# EAGLE board MAG3110_Breakout-Panel-v12 (EAGLE 6.5.0), part 1 of 3
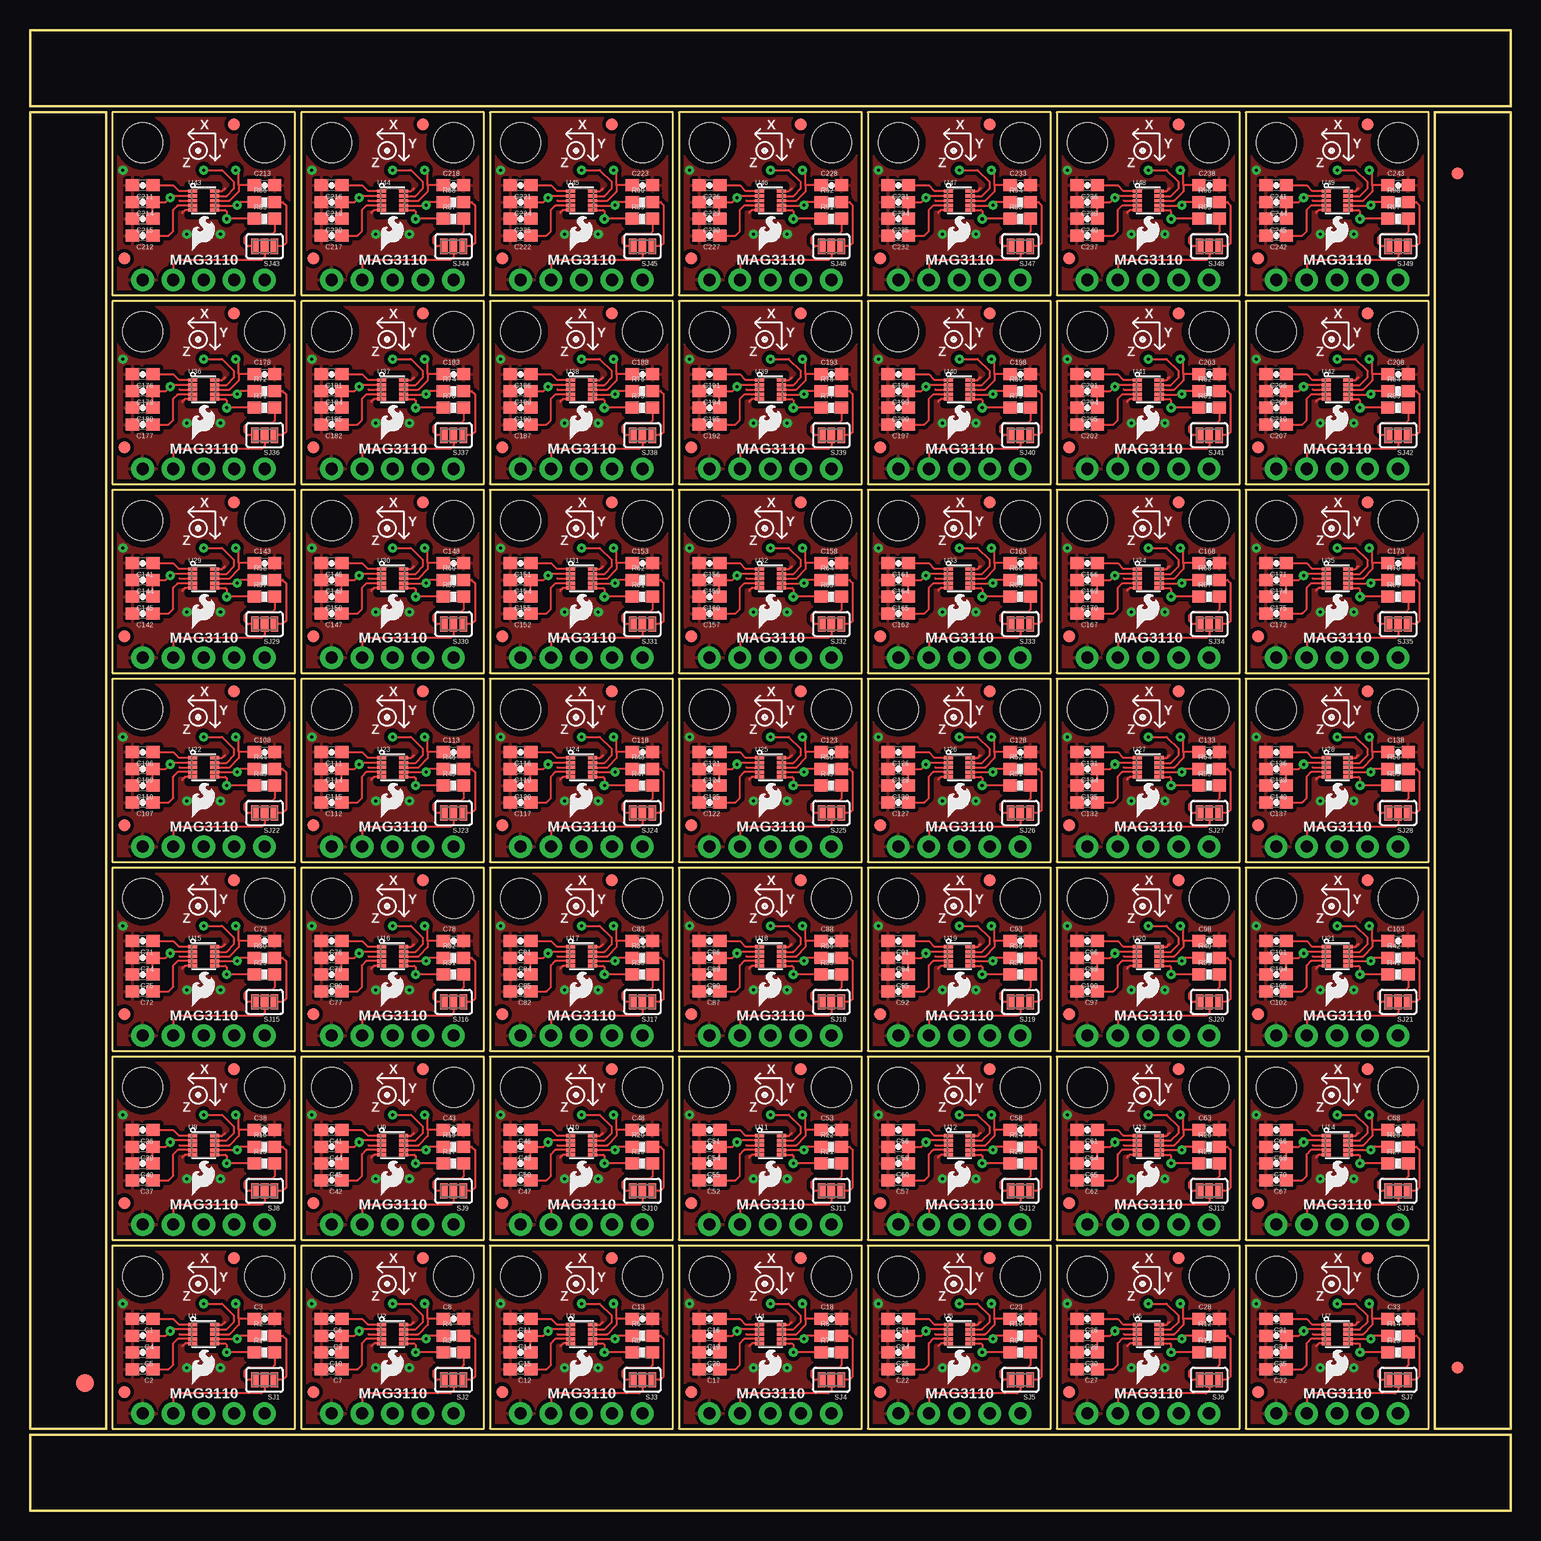
[diagram p0: board, top side]
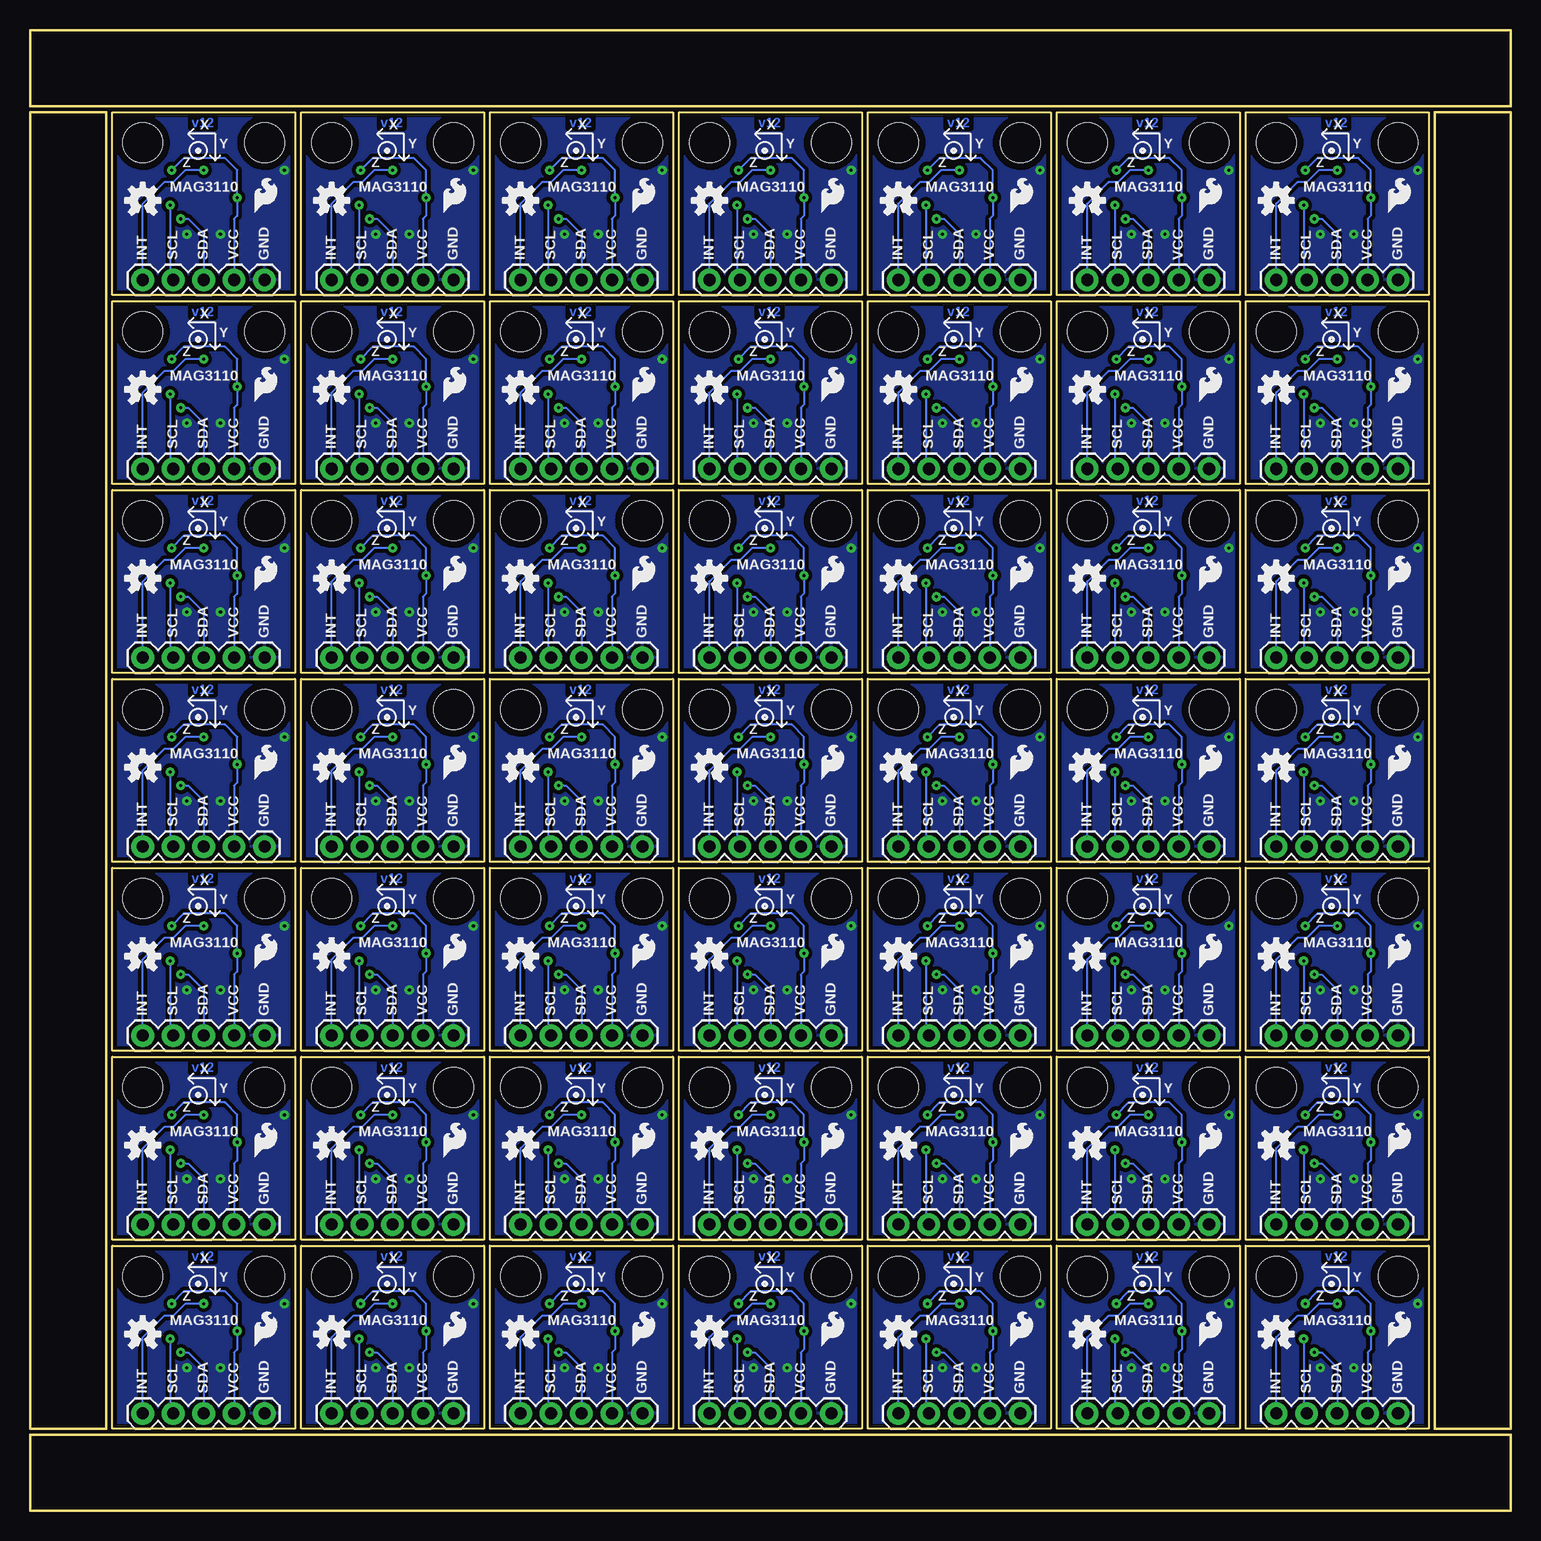
[diagram p1: board, bottom side, seen from below]

Size 123.44 x 123.44 mm. Coordinates in mm from the lower left corner, seen from the top.
Outline: 212 segments
Copper layers (1*16): Top 0.035mm / dielectric 1.5mm / Bottom 0.035mm
Design rules "SparkFun-2-layer *": minimum track width 7mil, minimum drill 10mil, track to track 8mil, track to pad 8mil, pad to pad 8mil, via to via 8mil, smd to smd 8mil, copper to edge 8mil, drill to drill 8mil, minimum pad ring 12mil, minimum via ring 10mil, stop-mask expansion 4mil, vias tented up to drill 20mil, thermal gap 10mil
tRestrict: area 14.1,13.7 to 14.9,15.7; area 13.2,15.9 to 15.7,16; area 13.2,13.5 to 15.7,13.6; area 29.8,13.7 to 30.6,15.7; area 29,15.9 to 31.5,16; area 29,13.5 to 31.5,13.6; area 45.6,13.7 to 46.4,15.7; area 44.7,15.9 to 47.2,16; area 44.7,13.5 to 47.2,13.6; area 61.3,13.7 to 62.1,15.7; area 60.5,15.9 to 63,16; area 60.5,13.5 to 63,13.6; 135 more areas

## Footprints (pad centres in the part's own frame; a part is rotated, then mirrored left to right if it is on the bottom)
0603-CAP = smd 1.1 x 1: 1 -0.85,0; 2 0.85,0
FIDUCIAL-1.5X3 = smd 1.5 x 1.5: 1 0,0
FIDUCIAL-1X2 = smd 1 x 1: 1 0,0
1X05 = drill 1.016 pad 1.88: 1 0,0; 2 2.54,0; 3 5.08,0; 4 7.62,0; 5 10.16,0
STAND-OFF = hole 3.302: 0,0
0603-RES = smd 1.1 x 1: 1 -0.85,0; 2 0.85,0
SJ_3_PASTE1&2&3 = smd 0.635 x 1.27: 1 -0.813,0; 2 0,0; 3 0.813,0
DFN-10-W = smd 0.762 x 0.279: 1 -0.91,0.787; 2 -0.91,0.381; 3 -0.91,0; 4 -0.91,-0.406; 5 -0.91,-0.787; 6 0.91,-0.787; 7 0.91,-0.406; 8 0.91,0; 9 0.91,0.381; 10 0.91,0.787

## Placement (x,y rotation side)
C1  0.1uF  [0603-CAP]  9.4,16 180 top
C2  0.1uF  [0603-CAP]  9.4,11.81 180 top
C3  0.1uF  [0603-CAP]  19.56,16 0 top
C4  1uF  [0603-CAP]  9.4,14.61 180 top
C5  0.1uF  [0603-CAP]  9.4,13.21 180 top
C6  0.1uF  [0603-CAP]  25.15,16 180 top
C7  0.1uF  [0603-CAP]  25.15,11.81 180 top
C8  0.1uF  [0603-CAP]  35.31,16 0 top
C9  1uF  [0603-CAP]  25.15,14.61 180 top
C10  0.1uF  [0603-CAP]  25.15,13.21 180 top
C11  0.1uF  [0603-CAP]  40.89,16 180 top
C12  0.1uF  [0603-CAP]  40.89,11.81 180 top
C13  0.1uF  [0603-CAP]  51.05,16 0 top
C14  1uF  [0603-CAP]  40.89,14.61 180 top
C15  0.1uF  [0603-CAP]  40.89,13.21 180 top
C16  0.1uF  [0603-CAP]  56.64,16 180 top
C17  0.1uF  [0603-CAP]  56.64,11.81 180 top
C18  0.1uF  [0603-CAP]  66.8,16 0 top
C19  1uF  [0603-CAP]  56.64,14.61 180 top
C20  0.1uF  [0603-CAP]  56.64,13.21 180 top
C21  0.1uF  [0603-CAP]  72.39,16 180 top
C22  0.1uF  [0603-CAP]  72.39,11.81 180 top
C23  0.1uF  [0603-CAP]  82.55,16 0 top
C24  1uF  [0603-CAP]  72.39,14.61 180 top
C25  0.1uF  [0603-CAP]  72.39,13.21 180 top
C26  0.1uF  [0603-CAP]  88.14,16 180 top
C27  0.1uF  [0603-CAP]  88.14,11.81 180 top
C28  0.1uF  [0603-CAP]  98.3,16 0 top
C29  1uF  [0603-CAP]  88.14,14.61 180 top
C30  0.1uF  [0603-CAP]  88.14,13.21 180 top
C31  0.1uF  [0603-CAP]  103.89,16 180 top
C32  0.1uF  [0603-CAP]  103.89,11.81 180 top
C33  0.1uF  [0603-CAP]  114.05,16 0 top
C34  1uF  [0603-CAP]  103.89,14.61 180 top
C35  0.1uF  [0603-CAP]  103.89,13.21 180 top
C36  0.1uF  [0603-CAP]  9.4,31.75 180 top
C37  0.1uF  [0603-CAP]  9.4,27.56 180 top
C38  0.1uF  [0603-CAP]  19.56,31.75 0 top
C39  1uF  [0603-CAP]  9.4,30.35 180 top
C40  0.1uF  [0603-CAP]  9.4,28.96 180 top
C41  0.1uF  [0603-CAP]  25.15,31.75 180 top
C42  0.1uF  [0603-CAP]  25.15,27.56 180 top
C43  0.1uF  [0603-CAP]  35.31,31.75 0 top
C44  1uF  [0603-CAP]  25.15,30.35 180 top
C45  0.1uF  [0603-CAP]  25.15,28.96 180 top
C46  0.1uF  [0603-CAP]  40.89,31.75 180 top
C47  0.1uF  [0603-CAP]  40.89,27.56 180 top
C48  0.1uF  [0603-CAP]  51.05,31.75 0 top
C49  1uF  [0603-CAP]  40.89,30.35 180 top
C50  0.1uF  [0603-CAP]  40.89,28.96 180 top
C51  0.1uF  [0603-CAP]  56.64,31.75 180 top
C52  0.1uF  [0603-CAP]  56.64,27.56 180 top
C53  0.1uF  [0603-CAP]  66.8,31.75 0 top
C54  1uF  [0603-CAP]  56.64,30.35 180 top
C55  0.1uF  [0603-CAP]  56.64,28.96 180 top
C56  0.1uF  [0603-CAP]  72.39,31.75 180 top
C57  0.1uF  [0603-CAP]  72.39,27.56 180 top
C58  0.1uF  [0603-CAP]  82.55,31.75 0 top
C59  1uF  [0603-CAP]  72.39,30.35 180 top
C60  0.1uF  [0603-CAP]  72.39,28.96 180 top
C61  0.1uF  [0603-CAP]  88.14,31.75 180 top
C62  0.1uF  [0603-CAP]  88.14,27.56 180 top
C63  0.1uF  [0603-CAP]  98.3,31.75 0 top
C64  1uF  [0603-CAP]  88.14,30.35 180 top
C65  0.1uF  [0603-CAP]  88.14,28.96 180 top
C66  0.1uF  [0603-CAP]  103.89,31.75 180 top
C67  0.1uF  [0603-CAP]  103.89,27.56 180 top
C68  0.1uF  [0603-CAP]  114.05,31.75 0 top
C69  1uF  [0603-CAP]  103.89,30.35 180 top
C70  0.1uF  [0603-CAP]  103.89,28.96 180 top
C71  0.1uF  [0603-CAP]  9.4,47.5 180 top
C72  0.1uF  [0603-CAP]  9.4,43.31 180 top
C73  0.1uF  [0603-CAP]  19.56,47.5 0 top
C74  1uF  [0603-CAP]  9.4,46.1 180 top
C75  0.1uF  [0603-CAP]  9.4,44.7 180 top
C76  0.1uF  [0603-CAP]  25.15,47.5 180 top
C77  0.1uF  [0603-CAP]  25.15,43.31 180 top
C78  0.1uF  [0603-CAP]  35.31,47.5 0 top
C79  1uF  [0603-CAP]  25.15,46.1 180 top
C80  0.1uF  [0603-CAP]  25.15,44.7 180 top
C81  0.1uF  [0603-CAP]  40.89,47.5 180 top
C82  0.1uF  [0603-CAP]  40.89,43.31 180 top
C83  0.1uF  [0603-CAP]  51.05,47.5 0 top
C84  1uF  [0603-CAP]  40.89,46.1 180 top
C85  0.1uF  [0603-CAP]  40.89,44.7 180 top
C86  0.1uF  [0603-CAP]  56.64,47.5 180 top
C87  0.1uF  [0603-CAP]  56.64,43.31 180 top
C88  0.1uF  [0603-CAP]  66.8,47.5 0 top
C89  1uF  [0603-CAP]  56.64,46.1 180 top
C90  0.1uF  [0603-CAP]  56.64,44.7 180 top
C91  0.1uF  [0603-CAP]  72.39,47.5 180 top
C92  0.1uF  [0603-CAP]  72.39,43.31 180 top
C93  0.1uF  [0603-CAP]  82.55,47.5 0 top
C94  1uF  [0603-CAP]  72.39,46.1 180 top
C95  0.1uF  [0603-CAP]  72.39,44.7 180 top
C96  0.1uF  [0603-CAP]  88.14,47.5 180 top
C97  0.1uF  [0603-CAP]  88.14,43.31 180 top
C98  0.1uF  [0603-CAP]  98.3,47.5 0 top
C99  1uF  [0603-CAP]  88.14,46.1 180 top
C100  0.1uF  [0603-CAP]  88.14,44.7 180 top
C101  0.1uF  [0603-CAP]  103.89,47.5 180 top
C102  0.1uF  [0603-CAP]  103.89,43.31 180 top
C103  0.1uF  [0603-CAP]  114.05,47.5 0 top
C104  1uF  [0603-CAP]  103.89,46.1 180 top
C105  0.1uF  [0603-CAP]  103.89,44.7 180 top
C106  0.1uF  [0603-CAP]  9.4,63.25 180 top
C107  0.1uF  [0603-CAP]  9.4,59.05 180 top
C108  0.1uF  [0603-CAP]  19.56,63.25 0 top
C109  1uF  [0603-CAP]  9.4,61.85 180 top
C110  0.1uF  [0603-CAP]  9.4,60.45 180 top
C111  0.1uF  [0603-CAP]  25.15,63.25 180 top
C112  0.1uF  [0603-CAP]  25.15,59.05 180 top
C113  0.1uF  [0603-CAP]  35.31,63.25 0 top
C114  1uF  [0603-CAP]  25.15,61.85 180 top
C115  0.1uF  [0603-CAP]  25.15,60.45 180 top
C116  0.1uF  [0603-CAP]  40.89,63.25 180 top
C117  0.1uF  [0603-CAP]  40.89,59.05 180 top
C118  0.1uF  [0603-CAP]  51.05,63.25 0 top
C119  1uF  [0603-CAP]  40.89,61.85 180 top
C120  0.1uF  [0603-CAP]  40.89,60.45 180 top
C121  0.1uF  [0603-CAP]  56.64,63.25 180 top
C122  0.1uF  [0603-CAP]  56.64,59.05 180 top
C123  0.1uF  [0603-CAP]  66.8,63.25 0 top
C124  1uF  [0603-CAP]  56.64,61.85 180 top
C125  0.1uF  [0603-CAP]  56.64,60.45 180 top
C126  0.1uF  [0603-CAP]  72.39,63.25 180 top
C127  0.1uF  [0603-CAP]  72.39,59.05 180 top
C128  0.1uF  [0603-CAP]  82.55,63.25 0 top
C129  1uF  [0603-CAP]  72.39,61.85 180 top
C130  0.1uF  [0603-CAP]  72.39,60.45 180 top
C131  0.1uF  [0603-CAP]  88.14,63.25 180 top
C132  0.1uF  [0603-CAP]  88.14,59.05 180 top
C133  0.1uF  [0603-CAP]  98.3,63.25 0 top
C134  1uF  [0603-CAP]  88.14,61.85 180 top
C135  0.1uF  [0603-CAP]  88.14,60.45 180 top
C136  0.1uF  [0603-CAP]  103.89,63.25 180 top
C137  0.1uF  [0603-CAP]  103.89,59.05 180 top
C138  0.1uF  [0603-CAP]  114.05,63.25 0 top
C139  1uF  [0603-CAP]  103.89,61.85 180 top
C140  0.1uF  [0603-CAP]  103.89,60.45 180 top
C141  0.1uF  [0603-CAP]  9.4,78.99 180 top
C142  0.1uF  [0603-CAP]  9.4,74.8 180 top
C143  0.1uF  [0603-CAP]  19.56,78.99 0 top
C144  1uF  [0603-CAP]  9.4,77.6 180 top
C145  0.1uF  [0603-CAP]  9.4,76.2 180 top
C146  0.1uF  [0603-CAP]  25.15,78.99 180 top
C147  0.1uF  [0603-CAP]  25.15,74.8 180 top
C148  0.1uF  [0603-CAP]  35.31,78.99 0 top
C149  1uF  [0603-CAP]  25.15,77.6 180 top
C150  0.1uF  [0603-CAP]  25.15,76.2 180 top
C151  0.1uF  [0603-CAP]  40.89,78.99 180 top
C152  0.1uF  [0603-CAP]  40.89,74.8 180 top
C153  0.1uF  [0603-CAP]  51.05,78.99 0 top
C154  1uF  [0603-CAP]  40.89,77.6 180 top
C155  0.1uF  [0603-CAP]  40.89,76.2 180 top
C156  0.1uF  [0603-CAP]  56.64,78.99 180 top
C157  0.1uF  [0603-CAP]  56.64,74.8 180 top
C158  0.1uF  [0603-CAP]  66.8,78.99 0 top
C159  1uF  [0603-CAP]  56.64,77.6 180 top
C160  0.1uF  [0603-CAP]  56.64,76.2 180 top
C161  0.1uF  [0603-CAP]  72.39,78.99 180 top
C162  0.1uF  [0603-CAP]  72.39,74.8 180 top
C163  0.1uF  [0603-CAP]  82.55,78.99 0 top
C164  1uF  [0603-CAP]  72.39,77.6 180 top
C165  0.1uF  [0603-CAP]  72.39,76.2 180 top
C166  0.1uF  [0603-CAP]  88.14,78.99 180 top
C167  0.1uF  [0603-CAP]  88.14,74.8 180 top
C168  0.1uF  [0603-CAP]  98.3,78.99 0 top
C169  1uF  [0603-CAP]  88.14,77.6 180 top
C170  0.1uF  [0603-CAP]  88.14,76.2 180 top
C171  0.1uF  [0603-CAP]  103.89,78.99 180 top
C172  0.1uF  [0603-CAP]  103.89,74.8 180 top
C173  0.1uF  [0603-CAP]  114.05,78.99 0 top
C174  1uF  [0603-CAP]  103.89,77.6 180 top
C175  0.1uF  [0603-CAP]  103.89,76.2 180 top
C176  0.1uF  [0603-CAP]  9.4,94.74 180 top
C177  0.1uF  [0603-CAP]  9.4,90.55 180 top
C178  0.1uF  [0603-CAP]  19.56,94.74 0 top
C179  1uF  [0603-CAP]  9.4,93.34 180 top
C180  0.1uF  [0603-CAP]  9.4,91.95 180 top
C181  0.1uF  [0603-CAP]  25.15,94.74 180 top
C182  0.1uF  [0603-CAP]  25.15,90.55 180 top
C183  0.1uF  [0603-CAP]  35.31,94.74 0 top
C184  1uF  [0603-CAP]  25.15,93.34 180 top
C185  0.1uF  [0603-CAP]  25.15,91.95 180 top
C186  0.1uF  [0603-CAP]  40.89,94.74 180 top
C187  0.1uF  [0603-CAP]  40.89,90.55 180 top
C188  0.1uF  [0603-CAP]  51.05,94.74 0 top
C189  1uF  [0603-CAP]  40.89,93.34 180 top
C190  0.1uF  [0603-CAP]  40.89,91.95 180 top
C191  0.1uF  [0603-CAP]  56.64,94.74 180 top
C192  0.1uF  [0603-CAP]  56.64,90.55 180 top
C193  0.1uF  [0603-CAP]  66.8,94.74 0 top
C194  1uF  [0603-CAP]  56.64,93.34 180 top
C195  0.1uF  [0603-CAP]  56.64,91.95 180 top
C196  0.1uF  [0603-CAP]  72.39,94.74 180 top
C197  0.1uF  [0603-CAP]  72.39,90.55 180 top
C198  0.1uF  [0603-CAP]  82.55,94.74 0 top
C199  1uF  [0603-CAP]  72.39,93.34 180 top
C200  0.1uF  [0603-CAP]  72.39,91.95 180 top
C201  0.1uF  [0603-CAP]  88.14,94.74 180 top
C202  0.1uF  [0603-CAP]  88.14,90.55 180 top
C203  0.1uF  [0603-CAP]  98.3,94.74 0 top
C204  1uF  [0603-CAP]  88.14,93.34 180 top
C205  0.1uF  [0603-CAP]  88.14,91.95 180 top
C206  0.1uF  [0603-CAP]  103.89,94.74 180 top
C207  0.1uF  [0603-CAP]  103.89,90.55 180 top
C208  0.1uF  [0603-CAP]  114.05,94.74 0 top
C209  1uF  [0603-CAP]  103.89,93.34 180 top
C210  0.1uF  [0603-CAP]  103.89,91.95 180 top
C211  0.1uF  [0603-CAP]  9.4,110.49 180 top
C212  0.1uF  [0603-CAP]  9.4,106.3 180 top
C213  0.1uF  [0603-CAP]  19.56,110.49 0 top
C214  1uF  [0603-CAP]  9.4,109.09 180 top
C215  0.1uF  [0603-CAP]  9.4,107.7 180 top
C216  0.1uF  [0603-CAP]  25.15,110.49 180 top
C217  0.1uF  [0603-CAP]  25.15,106.3 180 top
C218  0.1uF  [0603-CAP]  35.31,110.49 0 top
C219  1uF  [0603-CAP]  25.15,109.09 180 top
C220  0.1uF  [0603-CAP]  25.15,107.7 180 top
C221  0.1uF  [0603-CAP]  40.89,110.49 180 top
C222  0.1uF  [0603-CAP]  40.89,106.3 180 top
C223  0.1uF  [0603-CAP]  51.05,110.49 0 top
C224  1uF  [0603-CAP]  40.89,109.09 180 top
C225  0.1uF  [0603-CAP]  40.89,107.7 180 top
C226  0.1uF  [0603-CAP]  56.64,110.49 180 top
C227  0.1uF  [0603-CAP]  56.64,106.3 180 top
C228  0.1uF  [0603-CAP]  66.8,110.49 0 top
C229  1uF  [0603-CAP]  56.64,109.09 180 top
C230  0.1uF  [0603-CAP]  56.64,107.7 180 top
C231  0.1uF  [0603-CAP]  72.39,110.49 180 top
C232  0.1uF  [0603-CAP]  72.39,106.3 180 top
C233  0.1uF  [0603-CAP]  82.55,110.49 0 top
C234  1uF  [0603-CAP]  72.39,109.09 180 top
C235  0.1uF  [0603-CAP]  72.39,107.7 180 top
C236  0.1uF  [0603-CAP]  88.14,110.49 180 top
C237  0.1uF  [0603-CAP]  88.14,106.3 180 top
C238  0.1uF  [0603-CAP]  98.3,110.49 0 top
C239  1uF  [0603-CAP]  88.14,109.09 180 top
C240  0.1uF  [0603-CAP]  88.14,107.7 180 top
C241  0.1uF  [0603-CAP]  103.89,110.49 180 top
C242  0.1uF  [0603-CAP]  103.89,106.3 180 top
C243  0.1uF  [0603-CAP]  114.05,110.49 0 top
C244  1uF  [0603-CAP]  103.89,109.09 180 top
C245  0.1uF  [0603-CAP]  103.89,107.7 180 top
E$1  [FIDUCIAL-1.5X3]  4.57,10.67 0 top
E$4  [FIDUCIAL-1X2]  119,11.94 0 top
E$6  [FIDUCIAL-1X2]  119,111.51 180 top
FID1  FIDUCIAL1X2  [FIDUCIAL-1X2]  7.87,9.91 0 top
FID2  FIDUCIAL1X2  [FIDUCIAL-1X2]  17.02,21.08 0 top
FID3  FIDUCIAL1X2  [FIDUCIAL-1X2]  23.62,9.91 0 top
FID4  FIDUCIAL1X2  [FIDUCIAL-1X2]  32.77,21.08 0 top
FID5  FIDUCIAL1X2  [FIDUCIAL-1X2]  39.37,9.91 0 top
FID6  FIDUCIAL1X2  [FIDUCIAL-1X2]  48.51,21.08 0 top
FID7  FIDUCIAL1X2  [FIDUCIAL-1X2]  55.12,9.91 0 top
FID8  FIDUCIAL1X2  [FIDUCIAL-1X2]  64.26,21.08 0 top
FID9  FIDUCIAL1X2  [FIDUCIAL-1X2]  70.87,9.91 0 top
FID10  FIDUCIAL1X2  [FIDUCIAL-1X2]  80.01,21.08 0 top
FID11  FIDUCIAL1X2  [FIDUCIAL-1X2]  86.61,9.91 0 top
FID12  FIDUCIAL1X2  [FIDUCIAL-1X2]  95.76,21.08 0 top
FID13  FIDUCIAL1X2  [FIDUCIAL-1X2]  102.36,9.91 0 top
FID14  FIDUCIAL1X2  [FIDUCIAL-1X2]  111.51,21.08 0 top
FID15  FIDUCIAL1X2  [FIDUCIAL-1X2]  7.87,25.65 0 top
FID16  FIDUCIAL1X2  [FIDUCIAL-1X2]  17.02,36.83 0 top
FID17  FIDUCIAL1X2  [FIDUCIAL-1X2]  23.62,25.65 0 top
FID18  FIDUCIAL1X2  [FIDUCIAL-1X2]  32.77,36.83 0 top
FID19  FIDUCIAL1X2  [FIDUCIAL-1X2]  39.37,25.65 0 top
FID20  FIDUCIAL1X2  [FIDUCIAL-1X2]  48.51,36.83 0 top
FID21  FIDUCIAL1X2  [FIDUCIAL-1X2]  55.12,25.65 0 top
FID22  FIDUCIAL1X2  [FIDUCIAL-1X2]  64.26,36.83 0 top
FID23  FIDUCIAL1X2  [FIDUCIAL-1X2]  70.87,25.65 0 top
FID24  FIDUCIAL1X2  [FIDUCIAL-1X2]  80.01,36.83 0 top
FID25  FIDUCIAL1X2  [FIDUCIAL-1X2]  86.61,25.65 0 top
FID26  FIDUCIAL1X2  [FIDUCIAL-1X2]  95.76,36.83 0 top
FID27  FIDUCIAL1X2  [FIDUCIAL-1X2]  102.36,25.65 0 top
FID28  FIDUCIAL1X2  [FIDUCIAL-1X2]  111.51,36.83 0 top
FID29  FIDUCIAL1X2  [FIDUCIAL-1X2]  7.87,41.4 0 top
FID30  FIDUCIAL1X2  [FIDUCIAL-1X2]  17.02,52.58 0 top
FID31  FIDUCIAL1X2  [FIDUCIAL-1X2]  23.62,41.4 0 top
FID32  FIDUCIAL1X2  [FIDUCIAL-1X2]  32.77,52.58 0 top
FID33  FIDUCIAL1X2  [FIDUCIAL-1X2]  39.37,41.4 0 top
FID34  FIDUCIAL1X2  [FIDUCIAL-1X2]  48.51,52.58 0 top
FID35  FIDUCIAL1X2  [FIDUCIAL-1X2]  55.12,41.4 0 top
FID36  FIDUCIAL1X2  [FIDUCIAL-1X2]  64.26,52.58 0 top
FID37  FIDUCIAL1X2  [FIDUCIAL-1X2]  70.87,41.4 0 top
FID38  FIDUCIAL1X2  [FIDUCIAL-1X2]  80.01,52.58 0 top
FID39  FIDUCIAL1X2  [FIDUCIAL-1X2]  86.61,41.4 0 top
FID40  FIDUCIAL1X2  [FIDUCIAL-1X2]  95.76,52.58 0 top
FID41  FIDUCIAL1X2  [FIDUCIAL-1X2]  102.36,41.4 0 top
FID42  FIDUCIAL1X2  [FIDUCIAL-1X2]  111.51,52.58 0 top
FID43  FIDUCIAL1X2  [FIDUCIAL-1X2]  7.87,57.15 0 top
FID44  FIDUCIAL1X2  [FIDUCIAL-1X2]  17.02,68.33 0 top
FID45  FIDUCIAL1X2  [FIDUCIAL-1X2]  23.62,57.15 0 top
FID46  FIDUCIAL1X2  [FIDUCIAL-1X2]  32.77,68.33 0 top
FID47  FIDUCIAL1X2  [FIDUCIAL-1X2]  39.37,57.15 0 top
FID48  FIDUCIAL1X2  [FIDUCIAL-1X2]  48.51,68.33 0 top
FID49  FIDUCIAL1X2  [FIDUCIAL-1X2]  55.12,57.15 0 top
FID50  FIDUCIAL1X2  [FIDUCIAL-1X2]  64.26,68.33 0 top
FID51  FIDUCIAL1X2  [FIDUCIAL-1X2]  70.87,57.15 0 top
FID52  FIDUCIAL1X2  [FIDUCIAL-1X2]  80.01,68.33 0 top
FID53  FIDUCIAL1X2  [FIDUCIAL-1X2]  86.61,57.15 0 top
FID54  FIDUCIAL1X2  [FIDUCIAL-1X2]  95.76,68.33 0 top
FID55  FIDUCIAL1X2  [FIDUCIAL-1X2]  102.36,57.15 0 top
FID56  FIDUCIAL1X2  [FIDUCIAL-1X2]  111.51,68.33 0 top
FID57  FIDUCIAL1X2  [FIDUCIAL-1X2]  7.87,72.9 0 top
FID58  FIDUCIAL1X2  [FIDUCIAL-1X2]  17.02,84.07 0 top
FID59  FIDUCIAL1X2  [FIDUCIAL-1X2]  23.62,72.9 0 top
FID60  FIDUCIAL1X2  [FIDUCIAL-1X2]  32.77,84.07 0 top
FID61  FIDUCIAL1X2  [FIDUCIAL-1X2]  39.37,72.9 0 top
FID62  FIDUCIAL1X2  [FIDUCIAL-1X2]  48.51,84.07 0 top
FID63  FIDUCIAL1X2  [FIDUCIAL-1X2]  55.12,72.9 0 top
FID64  FIDUCIAL1X2  [FIDUCIAL-1X2]  64.26,84.07 0 top
FID65  FIDUCIAL1X2  [FIDUCIAL-1X2]  70.87,72.9 0 top
FID66  FIDUCIAL1X2  [FIDUCIAL-1X2]  80.01,84.07 0 top
FID67  FIDUCIAL1X2  [FIDUCIAL-1X2]  86.61,72.9 0 top
FID68  FIDUCIAL1X2  [FIDUCIAL-1X2]  95.76,84.07 0 top
FID69  FIDUCIAL1X2  [FIDUCIAL-1X2]  102.36,72.9 0 top
FID70  FIDUCIAL1X2  [FIDUCIAL-1X2]  111.51,84.07 0 top
FID71  FIDUCIAL1X2  [FIDUCIAL-1X2]  7.87,88.65 0 top
FID72  FIDUCIAL1X2  [FIDUCIAL-1X2]  17.02,99.82 0 top
FID73  FIDUCIAL1X2  [FIDUCIAL-1X2]  23.62,88.65 0 top
FID74  FIDUCIAL1X2  [FIDUCIAL-1X2]  32.77,99.82 0 top
FID75  FIDUCIAL1X2  [FIDUCIAL-1X2]  39.37,88.65 0 top
FID76  FIDUCIAL1X2  [FIDUCIAL-1X2]  48.51,99.82 0 top
FID77  FIDUCIAL1X2  [FIDUCIAL-1X2]  55.12,88.65 0 top
FID78  FIDUCIAL1X2  [FIDUCIAL-1X2]  64.26,99.82 0 top
FID79  FIDUCIAL1X2  [FIDUCIAL-1X2]  70.87,88.65 0 top
FID80  FIDUCIAL1X2  [FIDUCIAL-1X2]  80.01,99.82 0 top
FID81  FIDUCIAL1X2  [FIDUCIAL-1X2]  86.61,88.65 0 top
FID82  FIDUCIAL1X2  [FIDUCIAL-1X2]  95.76,99.82 0 top
FID83  FIDUCIAL1X2  [FIDUCIAL-1X2]  102.36,88.65 0 top
FID84  FIDUCIAL1X2  [FIDUCIAL-1X2]  111.51,99.82 0 top
FID85  FIDUCIAL1X2  [FIDUCIAL-1X2]  7.87,104.39 0 top
FID86  FIDUCIAL1X2  [FIDUCIAL-1X2]  17.02,115.57 0 top
FID87  FIDUCIAL1X2  [FIDUCIAL-1X2]  23.62,104.39 0 top
FID88  FIDUCIAL1X2  [FIDUCIAL-1X2]  32.77,115.57 0 top
FID89  FIDUCIAL1X2  [FIDUCIAL-1X2]  39.37,104.39 0 top
FID90  FIDUCIAL1X2  [FIDUCIAL-1X2]  48.51,115.57 0 top
FID91  FIDUCIAL1X2  [FIDUCIAL-1X2]  55.12,104.39 0 top
FID92  FIDUCIAL1X2  [FIDUCIAL-1X2]  64.26,115.57 0 top
FID93  FIDUCIAL1X2  [FIDUCIAL-1X2]  70.87,104.39 0 top
FID94  FIDUCIAL1X2  [FIDUCIAL-1X2]  80.01,115.57 0 top
FID95  FIDUCIAL1X2  [FIDUCIAL-1X2]  86.61,104.39 0 top
FID96  FIDUCIAL1X2  [FIDUCIAL-1X2]  95.76,115.57 0 top
FID97  FIDUCIAL1X2  [FIDUCIAL-1X2]  102.36,104.39 0 top
FID98  FIDUCIAL1X2  [FIDUCIAL-1X2]  111.51,115.57 0 top
JP1  breakout  [1X05]  9.4,8.13 180 bottom
JP2  STAND-OFF  [STAND-OFF]  9.4,19.56 0 top
JP3  STAND-OFF  [STAND-OFF]  19.56,19.56 0 top
JP4  LOGO-SFESK  [SFE-LOGO-FLAME]  10.21,13.77 0 bottom
JP5  breakout  [1X05]  25.15,8.13 180 bottom
JP6  STAND-OFF  [STAND-OFF]  25.15,19.56 0 top
JP7  LOGO-SFESK  [SFE-LOGO-FLAME]  13.54,10.59 0 top
JP8  STAND-OFF  [STAND-OFF]  35.31,19.56 0 top
JP9  LOGO-SFESK  [SFE-LOGO-FLAME]  25.96,13.77 0 bottom
JP10  LOGO-SFESK  [SFE-LOGO-FLAME]  29.29,10.59 0 top
JP11  breakout  [1X05]  40.89,8.13 180 bottom
JP12  STAND-OFF  [STAND-OFF]  40.89,19.56 0 top
JP13  STAND-OFF  [STAND-OFF]  51.05,19.56 0 top
JP14  LOGO-SFESK  [SFE-LOGO-FLAME]  41.71,13.77 0 bottom
JP15  LOGO-SFESK  [SFE-LOGO-FLAME]  45.03,10.59 0 top
JP16  breakout  [1X05]  56.64,8.13 180 bottom
JP17  STAND-OFF  [STAND-OFF]  56.64,19.56 0 top
JP18  STAND-OFF  [STAND-OFF]  66.8,19.56 0 top
JP19  LOGO-SFESK  [SFE-LOGO-FLAME]  57.45,13.77 0 bottom
JP20  LOGO-SFESK  [SFE-LOGO-FLAME]  60.78,10.59 0 top
JP21  breakout  [1X05]  72.39,8.13 180 bottom
JP22  STAND-OFF  [STAND-OFF]  72.39,19.56 0 top
JP23  STAND-OFF  [STAND-OFF]  82.55,19.56 0 top
JP24  LOGO-SFESK  [SFE-LOGO-FLAME]  73.2,13.77 0 bottom
JP25  LOGO-SFESK  [SFE-LOGO-FLAME]  76.53,10.59 0 top
JP26  breakout  [1X05]  88.14,8.13 180 bottom
JP27  STAND-OFF  [STAND-OFF]  88.14,19.56 0 top
JP28  STAND-OFF  [STAND-OFF]  98.3,19.56 0 top
JP29  LOGO-SFESK  [SFE-LOGO-FLAME]  88.95,13.77 0 bottom
JP30  LOGO-SFESK  [SFE-LOGO-FLAME]  92.28,10.59 0 top
JP31  breakout  [1X05]  103.89,8.13 180 bottom
JP32  STAND-OFF  [STAND-OFF]  103.89,19.56 0 top
JP33  STAND-OFF  [STAND-OFF]  114.05,19.56 0 top
JP34  LOGO-SFESK  [SFE-LOGO-FLAME]  104.7,13.77 0 bottom
JP35  LOGO-SFESK  [SFE-LOGO-FLAME]  108.03,10.59 0 top
JP36  breakout  [1X05]  9.4,23.88 180 bottom
JP37  STAND-OFF  [STAND-OFF]  9.4,35.31 0 top
JP38  STAND-OFF  [STAND-OFF]  19.56,35.31 0 top
JP39  LOGO-SFESK  [SFE-LOGO-FLAME]  10.21,29.51 0 bottom
JP40  LOGO-SFESK  [SFE-LOGO-FLAME]  13.54,26.34 0 top
JP41  breakout  [1X05]  25.15,23.88 180 bottom
JP42  STAND-OFF  [STAND-OFF]  25.15,35.31 0 top
JP43  STAND-OFF  [STAND-OFF]  35.31,35.31 0 top
JP44  LOGO-SFESK  [SFE-LOGO-FLAME]  25.96,29.51 0 bottom
JP45  LOGO-SFESK  [SFE-LOGO-FLAME]  29.29,26.34 0 top
JP46  breakout  [1X05]  40.89,23.88 180 bottom
JP47  STAND-OFF  [STAND-OFF]  40.89,35.31 0 top
JP48  STAND-OFF  [STAND-OFF]  51.05,35.31 0 top
JP49  LOGO-SFESK  [SFE-LOGO-FLAME]  41.71,29.51 0 bottom
JP50  LOGO-SFESK  [SFE-LOGO-FLAME]  45.03,26.34 0 top
JP51  breakout  [1X05]  56.64,23.88 180 bottom
JP52  STAND-OFF  [STAND-OFF]  56.64,35.31 0 top
JP53  STAND-OFF  [STAND-OFF]  66.8,35.31 0 top
JP54  LOGO-SFESK  [SFE-LOGO-FLAME]  57.45,29.51 0 bottom
JP55  LOGO-SFESK  [SFE-LOGO-FLAME]  60.78,26.34 0 top
JP56  breakout  [1X05]  72.39,23.88 180 bottom
JP57  STAND-OFF  [STAND-OFF]  72.39,35.31 0 top
JP58  STAND-OFF  [STAND-OFF]  82.55,35.31 0 top
JP59  LOGO-SFESK  [SFE-LOGO-FLAME]  73.2,29.51 0 bottom
JP60  LOGO-SFESK  [SFE-LOGO-FLAME]  76.53,26.34 0 top
JP61  breakout  [1X05]  88.14,23.88 180 bottom
JP62  STAND-OFF  [STAND-OFF]  88.14,35.31 0 top
JP63  STAND-OFF  [STAND-OFF]  98.3,35.31 0 top
JP64  LOGO-SFESK  [SFE-LOGO-FLAME]  88.95,29.51 0 bottom
JP65  LOGO-SFESK  [SFE-LOGO-FLAME]  92.28,26.34 0 top
JP66  breakout  [1X05]  103.89,23.88 180 bottom
JP67  STAND-OFF  [STAND-OFF]  103.89,35.31 0 top
JP68  STAND-OFF  [STAND-OFF]  114.05,35.31 0 top
JP69  LOGO-SFESK  [SFE-LOGO-FLAME]  104.7,29.51 0 bottom
JP70  LOGO-SFESK  [SFE-LOGO-FLAME]  108.03,26.34 0 top
JP71  breakout  [1X05]  9.4,39.62 180 bottom
JP72  STAND-OFF  [STAND-OFF]  9.4,51.05 0 top
JP73  STAND-OFF  [STAND-OFF]  19.56,51.05 0 top
JP74  LOGO-SFESK  [SFE-LOGO-FLAME]  10.21,45.26 0 bottom
JP75  LOGO-SFESK  [SFE-LOGO-FLAME]  13.54,42.09 0 top
JP76  breakout  [1X05]  25.15,39.62 180 bottom
JP77  STAND-OFF  [STAND-OFF]  25.15,51.05 0 top
JP78  STAND-OFF  [STAND-OFF]  35.31,51.05 0 top
JP79  LOGO-SFESK  [SFE-LOGO-FLAME]  25.96,45.26 0 bottom
JP80  LOGO-SFESK  [SFE-LOGO-FLAME]  29.29,42.09 0 top
JP81  breakout  [1X05]  40.89,39.62 180 bottom
JP82  STAND-OFF  [STAND-OFF]  40.89,51.05 0 top
JP83  STAND-OFF  [STAND-OFF]  51.05,51.05 0 top
JP84  LOGO-SFESK  [SFE-LOGO-FLAME]  41.71,45.26 0 bottom
JP85  LOGO-SFESK  [SFE-LOGO-FLAME]  45.03,42.09 0 top
JP86  breakout  [1X05]  56.64,39.62 180 bottom
JP87  STAND-OFF  [STAND-OFF]  56.64,51.05 0 top
JP88  STAND-OFF  [STAND-OFF]  66.8,51.05 0 top
JP89  LOGO-SFESK  [SFE-LOGO-FLAME]  57.45,45.26 0 bottom
JP90  LOGO-SFESK  [SFE-LOGO-FLAME]  60.78,42.09 0 top
JP91  breakout  [1X05]  72.39,39.62 180 bottom
JP92  STAND-OFF  [STAND-OFF]  72.39,51.05 0 top
JP93  STAND-OFF  [STAND-OFF]  82.55,51.05 0 top
JP94  LOGO-SFESK  [SFE-LOGO-FLAME]  73.2,45.26 0 bottom
JP95  LOGO-SFESK  [SFE-LOGO-FLAME]  76.53,42.09 0 top
JP96  breakout  [1X05]  88.14,39.62 180 bottom
JP97  STAND-OFF  [STAND-OFF]  88.14,51.05 0 top
JP98  STAND-OFF  [STAND-OFF]  98.3,51.05 0 top
JP99  LOGO-SFESK  [SFE-LOGO-FLAME]  88.95,45.26 0 bottom
JP100  LOGO-SFESK  [SFE-LOGO-FLAME]  92.28,42.09 0 top
JP101  breakout  [1X05]  103.89,39.62 180 bottom
JP102  STAND-OFF  [STAND-OFF]  103.89,51.05 0 top
JP103  STAND-OFF  [STAND-OFF]  114.05,51.05 0 top
JP104  LOGO-SFESK  [SFE-LOGO-FLAME]  104.7,45.26 0 bottom
JP105  LOGO-SFESK  [SFE-LOGO-FLAME]  108.03,42.09 0 top
JP106  breakout  [1X05]  9.4,55.37 180 bottom
JP107  STAND-OFF  [STAND-OFF]  9.4,66.8 0 top
JP108  STAND-OFF  [STAND-OFF]  19.56,66.8 0 top
JP109  LOGO-SFESK  [SFE-LOGO-FLAME]  10.21,61.01 0 bottom
JP110  LOGO-SFESK  [SFE-LOGO-FLAME]  13.54,57.84 0 top
JP111  breakout  [1X05]  25.15,55.37 180 bottom
JP112  STAND-OFF  [STAND-OFF]  25.15,66.8 0 top
JP113  STAND-OFF  [STAND-OFF]  35.31,66.8 0 top
JP114  LOGO-SFESK  [SFE-LOGO-FLAME]  25.96,61.01 0 bottom
JP115  LOGO-SFESK  [SFE-LOGO-FLAME]  29.29,57.84 0 top
JP116  breakout  [1X05]  40.89,55.37 180 bottom
JP117  STAND-OFF  [STAND-OFF]  40.89,66.8 0 top
JP118  STAND-OFF  [STAND-OFF]  51.05,66.8 0 top
JP119  LOGO-SFESK  [SFE-LOGO-FLAME]  41.71,61.01 0 bottom
JP120  LOGO-SFESK  [SFE-LOGO-FLAME]  45.03,57.84 0 top
JP121  breakout  [1X05]  56.64,55.37 180 bottom
JP122  STAND-OFF  [STAND-OFF]  56.64,66.8 0 top
JP123  STAND-OFF  [STAND-OFF]  66.8,66.8 0 top
JP124  LOGO-SFESK  [SFE-LOGO-FLAME]  57.45,61.01 0 bottom
JP125  LOGO-SFESK  [SFE-LOGO-FLAME]  60.78,57.84 0 top
JP126  breakout  [1X05]  72.39,55.37 180 bottom
JP127  STAND-OFF  [STAND-OFF]  72.39,66.8 0 top
JP128  STAND-OFF  [STAND-OFF]  82.55,66.8 0 top
JP129  LOGO-SFESK  [SFE-LOGO-FLAME]  73.2,61.01 0 bottom
JP130  LOGO-SFESK  [SFE-LOGO-FLAME]  76.53,57.84 0 top
JP131  breakout  [1X05]  88.14,55.37 180 bottom
JP132  STAND-OFF  [STAND-OFF]  88.14,66.8 0 top
JP133  STAND-OFF  [STAND-OFF]  98.3,66.8 0 top
JP134  LOGO-SFESK  [SFE-LOGO-FLAME]  88.95,61.01 0 bottom
JP135  LOGO-SFESK  [SFE-LOGO-FLAME]  92.28,57.84 0 top
JP136  breakout  [1X05]  103.89,55.37 180 bottom
JP137  STAND-OFF  [STAND-OFF]  103.89,66.8 0 top
JP138  STAND-OFF  [STAND-OFF]  114.05,66.8 0 top
JP139  LOGO-SFESK  [SFE-LOGO-FLAME]  104.7,61.01 0 bottom
JP140  LOGO-SFESK  [SFE-LOGO-FLAME]  108.03,57.84 0 top
JP141  breakout  [1X05]  9.4,71.12 180 bottom
JP142  STAND-OFF  [STAND-OFF]  9.4,82.55 0 top
JP143  STAND-OFF  [STAND-OFF]  19.56,82.55 0 top
JP144  LOGO-SFESK  [SFE-LOGO-FLAME]  10.21,76.76 0 bottom
JP145  LOGO-SFESK  [SFE-LOGO-FLAME]  13.54,73.58 0 top
JP146  breakout  [1X05]  25.15,71.12 180 bottom
JP147  STAND-OFF  [STAND-OFF]  25.15,82.55 0 top
JP148  STAND-OFF  [STAND-OFF]  35.31,82.55 0 top
JP149  LOGO-SFESK  [SFE-LOGO-FLAME]  25.96,76.76 0 bottom
JP150  LOGO-SFESK  [SFE-LOGO-FLAME]  29.29,73.58 0 top
JP151  breakout  [1X05]  40.89,71.12 180 bottom
JP152  STAND-OFF  [STAND-OFF]  40.89,82.55 0 top
JP153  STAND-OFF  [STAND-OFF]  51.05,82.55 0 top
JP154  LOGO-SFESK  [SFE-LOGO-FLAME]  41.71,76.76 0 bottom
JP155  LOGO-SFESK  [SFE-LOGO-FLAME]  45.03,73.58 0 top
JP156  breakout  [1X05]  56.64,71.12 180 bottom
JP157  STAND-OFF  [STAND-OFF]  56.64,82.55 0 top
JP158  STAND-OFF  [STAND-OFF]  66.8,82.55 0 top
JP159  LOGO-SFESK  [SFE-LOGO-FLAME]  57.45,76.76 0 bottom
JP160  LOGO-SFESK  [SFE-LOGO-FLAME]  60.78,73.58 0 top
JP161  breakout  [1X05]  72.39,71.12 180 bottom
JP162  STAND-OFF  [STAND-OFF]  72.39,82.55 0 top
JP163  STAND-OFF  [STAND-OFF]  82.55,82.55 0 top
JP164  LOGO-SFESK  [SFE-LOGO-FLAME]  73.2,76.76 0 bottom
JP165  LOGO-SFESK  [SFE-LOGO-FLAME]  76.53,73.58 0 top
JP166  breakout  [1X05]  88.14,71.12 180 bottom
JP167  STAND-OFF  [STAND-OFF]  88.14,82.55 0 top
JP168  STAND-OFF  [STAND-OFF]  98.3,82.55 0 top
JP169  LOGO-SFESK  [SFE-LOGO-FLAME]  88.95,76.76 0 bottom
JP170  LOGO-SFESK  [SFE-LOGO-FLAME]  92.28,73.58 0 top
JP171  breakout  [1X05]  103.89,71.12 180 bottom
JP172  STAND-OFF  [STAND-OFF]  103.89,82.55 0 top
JP173  STAND-OFF  [STAND-OFF]  114.05,82.55 0 top
JP174  LOGO-SFESK  [SFE-LOGO-FLAME]  104.7,76.76 0 bottom
JP175  LOGO-SFESK  [SFE-LOGO-FLAME]  108.03,73.58 0 top
JP176  breakout  [1X05]  9.4,86.87 180 bottom
JP177  STAND-OFF  [STAND-OFF]  9.4,98.3 0 top
JP178  STAND-OFF  [STAND-OFF]  19.56,98.3 0 top
JP179  LOGO-SFESK  [SFE-LOGO-FLAME]  10.21,92.51 0 bottom
JP180  LOGO-SFESK  [SFE-LOGO-FLAME]  13.54,89.33 0 top
JP181  breakout  [1X05]  25.15,86.87 180 bottom
JP182  STAND-OFF  [STAND-OFF]  25.15,98.3 0 top
JP183  STAND-OFF  [STAND-OFF]  35.31,98.3 0 top
JP184  LOGO-SFESK  [SFE-LOGO-FLAME]  25.96,92.51 0 bottom
JP185  LOGO-SFESK  [SFE-LOGO-FLAME]  29.29,89.33 0 top
JP186  breakout  [1X05]  40.89,86.87 180 bottom
JP187  STAND-OFF  [STAND-OFF]  40.89,98.3 0 top
JP188  STAND-OFF  [STAND-OFF]  51.05,98.3 0 top
JP189  LOGO-SFESK  [SFE-LOGO-FLAME]  41.71,92.51 0 bottom
JP190  LOGO-SFESK  [SFE-LOGO-FLAME]  45.03,89.33 0 top
JP191  breakout  [1X05]  56.64,86.87 180 bottom
JP192  STAND-OFF  [STAND-OFF]  56.64,98.3 0 top
JP193  STAND-OFF  [STAND-OFF]  66.8,98.3 0 top
JP194  LOGO-SFESK  [SFE-LOGO-FLAME]  57.45,92.51 0 bottom
JP195  LOGO-SFESK  [SFE-LOGO-FLAME]  60.78,89.33 0 top
JP196  breakout  [1X05]  72.39,86.87 180 bottom
JP197  STAND-OFF  [STAND-OFF]  72.39,98.3 0 top
JP198  STAND-OFF  [STAND-OFF]  82.55,98.3 0 top
JP199  LOGO-SFESK  [SFE-LOGO-FLAME]  73.2,92.51 0 bottom
JP200  LOGO-SFESK  [SFE-LOGO-FLAME]  76.53,89.33 0 top
JP201  breakout  [1X05]  88.14,86.87 180 bottom
JP202  STAND-OFF  [STAND-OFF]  88.14,98.3 0 top
JP203  STAND-OFF  [STAND-OFF]  98.3,98.3 0 top
JP204  LOGO-SFESK  [SFE-LOGO-FLAME]  88.95,92.51 0 bottom
JP205  LOGO-SFESK  [SFE-LOGO-FLAME]  92.28,89.33 0 top
JP206  breakout  [1X05]  103.89,86.87 180 bottom
JP207  STAND-OFF  [STAND-OFF]  103.89,98.3 0 top
JP208  STAND-OFF  [STAND-OFF]  114.05,98.3 0 top
JP209  LOGO-SFESK  [SFE-LOGO-FLAME]  104.7,92.51 0 bottom
JP210  LOGO-SFESK  [SFE-LOGO-FLAME]  108.03,89.33 0 top
JP211  breakout  [1X05]  9.4,102.62 180 bottom
JP212  STAND-OFF  [STAND-OFF]  9.4,114.05 0 top
JP213  STAND-OFF  [STAND-OFF]  19.56,114.05 0 top
JP214  LOGO-SFESK  [SFE-LOGO-FLAME]  10.21,108.25 0 bottom
JP215  LOGO-SFESK  [SFE-LOGO-FLAME]  13.54,105.08 0 top
JP216  breakout  [1X05]  25.15,102.62 180 bottom
JP217  STAND-OFF  [STAND-OFF]  25.15,114.05 0 top
JP218  STAND-OFF  [STAND-OFF]  35.31,114.05 0 top
JP219  LOGO-SFESK  [SFE-LOGO-FLAME]  25.96,108.25 0 bottom
JP220  LOGO-SFESK  [SFE-LOGO-FLAME]  29.29,105.08 0 top
JP221  breakout  [1X05]  40.89,102.62 180 bottom
JP222  STAND-OFF  [STAND-OFF]  40.89,114.05 0 top
JP223  STAND-OFF  [STAND-OFF]  51.05,114.05 0 top
JP224  LOGO-SFESK  [SFE-LOGO-FLAME]  41.71,108.25 0 bottom
JP225  LOGO-SFESK  [SFE-LOGO-FLAME]  45.03,105.08 0 top
JP226  breakout  [1X05]  56.64,102.62 180 bottom
JP227  STAND-OFF  [STAND-OFF]  56.64,114.05 0 top
JP228  STAND-OFF  [STAND-OFF]  66.8,114.05 0 top
JP229  LOGO-SFESK  [SFE-LOGO-FLAME]  57.45,108.25 0 bottom
JP230  LOGO-SFESK  [SFE-LOGO-FLAME]  60.78,105.08 0 top
JP231  breakout  [1X05]  72.39,102.62 180 bottom
JP232  STAND-OFF  [STAND-OFF]  72.39,114.05 0 top
JP233  STAND-OFF  [STAND-OFF]  82.55,114.05 0 top
JP234  LOGO-SFESK  [SFE-LOGO-FLAME]  73.2,108.25 0 bottom
JP235  LOGO-SFESK  [SFE-LOGO-FLAME]  76.53,105.08 0 top
JP236  breakout  [1X05]  88.14,102.62 180 bottom
JP237  STAND-OFF  [STAND-OFF]  88.14,114.05 0 top
JP238  STAND-OFF  [STAND-OFF]  98.3,114.05 0 top
JP239  LOGO-SFESK  [SFE-LOGO-FLAME]  88.95,108.25 0 bottom
JP240  LOGO-SFESK  [SFE-LOGO-FLAME]  92.28,105.08 0 top
JP241  breakout  [1X05]  103.89,102.62 180 bottom
JP242  STAND-OFF  [STAND-OFF]  103.89,114.05 0 top
JP243  STAND-OFF  [STAND-OFF]  114.05,114.05 0 top
JP244  LOGO-SFESK  [SFE-LOGO-FLAME]  104.7,108.25 0 bottom
JP245  LOGO-SFESK  [SFE-LOGO-FLAME]  108.03,105.08 0 top
LOGO1  OSHW-LOGOS  [OSHW-LOGO-S]  19.56,14.73 0 bottom
LOGO2  OSHW-LOGOS  [OSHW-LOGO-S]  35.31,14.73 0 bottom
LOGO3  OSHW-LOGOS  [OSHW-LOGO-S]  51.05,14.73 0 bottom
LOGO4  OSHW-LOGOS  [OSHW-LOGO-S]  66.8,14.73 0 bottom
LOGO5  OSHW-LOGOS  [OSHW-LOGO-S]  82.55,14.73 0 bottom
LOGO6  OSHW-LOGOS  [OSHW-LOGO-S]  98.3,14.73 0 bottom
LOGO7  OSHW-LOGOS  [OSHW-LOGO-S]  114.05,14.73 0 bottom
LOGO8  OSHW-LOGOS  [OSHW-LOGO-S]  19.56,30.48 0 bottom
LOGO9  OSHW-LOGOS  [OSHW-LOGO-S]  35.31,30.48 0 bottom
LOGO10  OSHW-LOGOS  [OSHW-LOGO-S]  51.05,30.48 0 bottom
LOGO11  OSHW-LOGOS  [OSHW-LOGO-S]  66.8,30.48 0 bottom
LOGO12  OSHW-LOGOS  [OSHW-LOGO-S]  82.55,30.48 0 bottom
LOGO13  OSHW-LOGOS  [OSHW-LOGO-S]  98.3,30.48 0 bottom
LOGO14  OSHW-LOGOS  [OSHW-LOGO-S]  114.05,30.48 0 bottom
LOGO15  OSHW-LOGOS  [OSHW-LOGO-S]  19.56,46.23 0 bottom
LOGO16  OSHW-LOGOS  [OSHW-LOGO-S]  35.31,46.23 0 bottom
LOGO17  OSHW-LOGOS  [OSHW-LOGO-S]  51.05,46.23 0 bottom
LOGO18  OSHW-LOGOS  [OSHW-LOGO-S]  66.8,46.23 0 bottom
LOGO19  OSHW-LOGOS  [OSHW-LOGO-S]  82.55,46.23 0 bottom
LOGO20  OSHW-LOGOS  [OSHW-LOGO-S]  98.3,46.23 0 bottom
LOGO21  OSHW-LOGOS  [OSHW-LOGO-S]  114.05,46.23 0 bottom
LOGO22  OSHW-LOGOS  [OSHW-LOGO-S]  19.56,61.98 0 bottom
LOGO23  OSHW-LOGOS  [OSHW-LOGO-S]  35.31,61.98 0 bottom
LOGO24  OSHW-LOGOS  [OSHW-LOGO-S]  51.05,61.98 0 bottom
LOGO25  OSHW-LOGOS  [OSHW-LOGO-S]  66.8,61.98 0 bottom
LOGO26  OSHW-LOGOS  [OSHW-LOGO-S]  82.55,61.98 0 bottom
LOGO27  OSHW-LOGOS  [OSHW-LOGO-S]  98.3,61.98 0 bottom
LOGO28  OSHW-LOGOS  [OSHW-LOGO-S]  114.05,61.98 0 bottom
LOGO29  OSHW-LOGOS  [OSHW-LOGO-S]  19.56,77.72 0 bottom
LOGO30  OSHW-LOGOS  [OSHW-LOGO-S]  35.31,77.72 0 bottom
LOGO31  OSHW-LOGOS  [OSHW-LOGO-S]  51.05,77.72 0 bottom
LOGO32  OSHW-LOGOS  [OSHW-LOGO-S]  66.8,77.72 0 bottom
LOGO33  OSHW-LOGOS  [OSHW-LOGO-S]  82.55,77.72 0 bottom
LOGO34  OSHW-LOGOS  [OSHW-LOGO-S]  98.3,77.72 0 bottom
LOGO35  OSHW-LOGOS  [OSHW-LOGO-S]  114.05,77.72 0 bottom
LOGO36  OSHW-LOGOS  [OSHW-LOGO-S]  19.56,93.47 0 bottom
LOGO37  OSHW-LOGOS  [OSHW-LOGO-S]  35.31,93.47 0 bottom
LOGO38  OSHW-LOGOS  [OSHW-LOGO-S]  51.05,93.47 0 bottom
LOGO39  OSHW-LOGOS  [OSHW-LOGO-S]  66.8,93.47 0 bottom
LOGO40  OSHW-LOGOS  [OSHW-LOGO-S]  82.55,93.47 0 bottom
LOGO41  OSHW-LOGOS  [OSHW-LOGO-S]  98.3,93.47 0 bottom
LOGO42  OSHW-LOGOS  [OSHW-LOGO-S]  114.05,93.47 0 bottom
LOGO43  OSHW-LOGOS  [OSHW-LOGO-S]  19.56,109.22 0 bottom
LOGO44  OSHW-LOGOS  [OSHW-LOGO-S]  35.31,109.22 0 bottom
LOGO45  OSHW-LOGOS  [OSHW-LOGO-S]  51.05,109.22 0 bottom
LOGO46  OSHW-LOGOS  [OSHW-LOGO-S]  66.8,109.22 0 bottom
LOGO47  OSHW-LOGOS  [OSHW-LOGO-S]  82.55,109.22 0 bottom
LOGO48  OSHW-LOGOS  [OSHW-LOGO-S]  98.3,109.22 0 bottom
LOGO49  OSHW-LOGOS  [OSHW-LOGO-S]  114.05,109.22 0 bottom
R1  4.7k  [0603-RES]  19.56,13.21 0 top
R2  4.7k  [0603-RES]  19.56,14.61 0 top
R3  4.7k  [0603-RES]  35.31,13.21 0 top
R4  4.7k  [0603-RES]  35.31,14.61 0 top
R5  4.7k  [0603-RES]  51.05,13.21 0 top
R6  4.7k  [0603-RES]  51.05,14.61 0 top
R7  4.7k  [0603-RES]  66.8,13.21 0 top
R8  4.7k  [0603-RES]  66.8,14.61 0 top
R9  4.7k  [0603-RES]  82.55,13.21 0 top
R10  4.7k  [0603-RES]  82.55,14.61 0 top
R11  4.7k  [0603-RES]  98.3,13.21 0 top
R12  4.7k  [0603-RES]  98.3,14.61 0 top
R13  4.7k  [0603-RES]  114.05,13.21 0 top
R14  4.7k  [0603-RES]  114.05,14.61 0 top
R15  4.7k  [0603-RES]  19.56,28.96 0 top
R16  4.7k  [0603-RES]  19.56,30.35 0 top
R17  4.7k  [0603-RES]  35.31,28.96 0 top
R18  4.7k  [0603-RES]  35.31,30.35 0 top
R19  4.7k  [0603-RES]  51.05,28.96 0 top
R20  4.7k  [0603-RES]  51.05,30.35 0 top
R21  4.7k  [0603-RES]  66.8,28.96 0 top
R22  4.7k  [0603-RES]  66.8,30.35 0 top
R23  4.7k  [0603-RES]  82.55,28.96 0 top
R24  4.7k  [0603-RES]  82.55,30.35 0 top
R25  4.7k  [0603-RES]  98.3,28.96 0 top
R26  4.7k  [0603-RES]  98.3,30.35 0 top
R27  4.7k  [0603-RES]  114.05,28.96 0 top
R28  4.7k  [0603-RES]  114.05,30.35 0 top
R29  4.7k  [0603-RES]  19.56,44.7 0 top
R30  4.7k  [0603-RES]  19.56,46.1 0 top
R31  4.7k  [0603-RES]  35.31,44.7 0 top
R32  4.7k  [0603-RES]  35.31,46.1 0 top
R33  4.7k  [0603-RES]  51.05,44.7 0 top
R34  4.7k  [0603-RES]  51.05,46.1 0 top
R35  4.7k  [0603-RES]  66.8,44.7 0 top
R36  4.7k  [0603-RES]  66.8,46.1 0 top
R37  4.7k  [0603-RES]  82.55,44.7 0 top
R38  4.7k  [0603-RES]  82.55,46.1 0 top
R39  4.7k  [0603-RES]  98.3,44.7 0 top
R40  4.7k  [0603-RES]  98.3,46.1 0 top
R41  4.7k  [0603-RES]  114.05,44.7 0 top
R42  4.7k  [0603-RES]  114.05,46.1 0 top
R43  4.7k  [0603-RES]  19.56,60.45 0 top
R44  4.7k  [0603-RES]  19.56,61.85 0 top
R45  4.7k  [0603-RES]  35.31,60.45 0 top
R46  4.7k  [0603-RES]  35.31,61.85 0 top
R47  4.7k  [0603-RES]  51.05,60.45 0 top
R48  4.7k  [0603-RES]  51.05,61.85 0 top
R49  4.7k  [0603-RES]  66.8,60.45 0 top
R50  4.7k  [0603-RES]  66.8,61.85 0 top
R51  4.7k  [0603-RES]  82.55,60.45 0 top
R52  4.7k  [0603-RES]  82.55,61.85 0 top
R53  4.7k  [0603-RES]  98.3,60.45 0 top
R54  4.7k  [0603-RES]  98.3,61.85 0 top
R55  4.7k  [0603-RES]  114.05,60.45 0 top
R56  4.7k  [0603-RES]  114.05,61.85 0 top
R57  4.7k  [0603-RES]  19.56,76.2 0 top
R58  4.7k  [0603-RES]  19.56,77.6 0 top
R59  4.7k  [0603-RES]  35.31,76.2 0 top
R60  4.7k  [0603-RES]  35.31,77.6 0 top
R61  4.7k  [0603-RES]  51.05,76.2 0 top
R62  4.7k  [0603-RES]  51.05,77.6 0 top
R63  4.7k  [0603-RES]  66.8,76.2 0 top
R64  4.7k  [0603-RES]  66.8,77.6 0 top
R65  4.7k  [0603-RES]  82.55,76.2 0 top
R66  4.7k  [0603-RES]  82.55,77.6 0 top
R67  4.7k  [0603-RES]  98.3,76.2 0 top
R68  4.7k  [0603-RES]  98.3,77.6 0 top
R69  4.7k  [0603-RES]  114.05,76.2 0 top
R70  4.7k  [0603-RES]  114.05,77.6 0 top
R71  4.7k  [0603-RES]  19.56,91.95 0 top
R72  4.7k  [0603-RES]  19.56,93.34 0 top
R73  4.7k  [0603-RES]  35.31,91.95 0 top
R74  4.7k  [0603-RES]  35.31,93.34 0 top
R75  4.7k  [0603-RES]  51.05,91.95 0 top
R76  4.7k  [0603-RES]  51.05,93.34 0 top
R77  4.7k  [0603-RES]  66.8,91.95 0 top
R78  4.7k  [0603-RES]  66.8,93.34 0 top
R79  4.7k  [0603-RES]  82.55,91.95 0 top
R80  4.7k  [0603-RES]  82.55,93.34 0 top
R81  4.7k  [0603-RES]  98.3,91.95 0 top
R82  4.7k  [0603-RES]  98.3,93.34 0 top
R83  4.7k  [0603-RES]  114.05,91.95 0 top
R84  4.7k  [0603-RES]  114.05,93.34 0 top
R85  4.7k  [0603-RES]  19.56,107.7 0 top
R86  4.7k  [0603-RES]  19.56,109.09 0 top
R87  4.7k  [0603-RES]  35.31,107.7 0 top
R88  4.7k  [0603-RES]  35.31,109.09 0 top
R89  4.7k  [0603-RES]  51.05,107.7 0 top
R90  4.7k  [0603-RES]  51.05,109.09 0 top
R91  4.7k  [0603-RES]  66.8,107.7 0 top
R92  4.7k  [0603-RES]  66.8,109.09 0 top
R93  4.7k  [0603-RES]  82.55,107.7 0 top
R94  4.7k  [0603-RES]  82.55,109.09 0 top
R95  4.7k  [0603-RES]  98.3,107.7 0 top
R96  4.7k  [0603-RES]  98.3,109.09 0 top
R97  4.7k  [0603-RES]  114.05,107.7 0 top
R98  4.7k  [0603-RES]  114.05,109.09 0 top
SJ1  [SJ_3_PASTE1&2&3]  19.56,10.92 180 top
SJ2  [SJ_3_PASTE1&2&3]  35.31,10.92 180 top
SJ3  [SJ_3_PASTE1&2&3]  51.05,10.92 180 top
SJ4  [SJ_3_PASTE1&2&3]  66.8,10.92 180 top
SJ5  [SJ_3_PASTE1&2&3]  82.55,10.92 180 top
SJ6  [SJ_3_PASTE1&2&3]  98.3,10.92 180 top
SJ7  [SJ_3_PASTE1&2&3]  114.05,10.92 180 top
SJ8  [SJ_3_PASTE1&2&3]  19.56,26.67 180 top
SJ9  [SJ_3_PASTE1&2&3]  35.31,26.67 180 top
SJ10  [SJ_3_PASTE1&2&3]  51.05,26.67 180 top
SJ11  [SJ_3_PASTE1&2&3]  66.8,26.67 180 top
SJ12  [SJ_3_PASTE1&2&3]  82.55,26.67 180 top
SJ13  [SJ_3_PASTE1&2&3]  98.3,26.67 180 top
SJ14  [SJ_3_PASTE1&2&3]  114.05,26.67 180 top
SJ15  [SJ_3_PASTE1&2&3]  19.56,42.42 180 top
SJ16  [SJ_3_PASTE1&2&3]  35.31,42.42 180 top
SJ17  [SJ_3_PASTE1&2&3]  51.05,42.42 180 top
SJ18  [SJ_3_PASTE1&2&3]  66.8,42.42 180 top
SJ19  [SJ_3_PASTE1&2&3]  82.55,42.42 180 top
SJ20  [SJ_3_PASTE1&2&3]  98.3,42.42 180 top
SJ21  [SJ_3_PASTE1&2&3]  114.05,42.42 180 top
SJ22  [SJ_3_PASTE1&2&3]  19.56,58.17 180 top
SJ23  [SJ_3_PASTE1&2&3]  35.31,58.17 180 top
SJ24  [SJ_3_PASTE1&2&3]  51.05,58.17 180 top
SJ25  [SJ_3_PASTE1&2&3]  66.8,58.17 180 top
SJ26  [SJ_3_PASTE1&2&3]  82.55,58.17 180 top
SJ27  [SJ_3_PASTE1&2&3]  98.3,58.17 180 top
SJ28  [SJ_3_PASTE1&2&3]  114.05,58.17 180 top
SJ29  [SJ_3_PASTE1&2&3]  19.56,73.91 180 top
SJ30  [SJ_3_PASTE1&2&3]  35.31,73.91 180 top
SJ31  [SJ_3_PASTE1&2&3]  51.05,73.91 180 top
SJ32  [SJ_3_PASTE1&2&3]  66.8,73.91 180 top
SJ33  [SJ_3_PASTE1&2&3]  82.55,73.91 180 top
SJ34  [SJ_3_PASTE1&2&3]  98.3,73.91 180 top
SJ35  [SJ_3_PASTE1&2&3]  114.05,73.91 180 top
SJ36  [SJ_3_PASTE1&2&3]  19.56,89.66 180 top
SJ37  [SJ_3_PASTE1&2&3]  35.31,89.66 180 top
SJ38  [SJ_3_PASTE1&2&3]  51.05,89.66 180 top
SJ39  [SJ_3_PASTE1&2&3]  66.8,89.66 180 top
SJ40  [SJ_3_PASTE1&2&3]  82.55,89.66 180 top
SJ41  [SJ_3_PASTE1&2&3]  98.3,89.66 180 top
SJ42  [SJ_3_PASTE1&2&3]  114.05,89.66 180 top
SJ43  [SJ_3_PASTE1&2&3]  19.56,105.41 180 top
SJ44  [SJ_3_PASTE1&2&3]  35.31,105.41 180 top
SJ45  [SJ_3_PASTE1&2&3]  51.05,105.41 180 top
SJ46  [SJ_3_PASTE1&2&3]  66.8,105.41 180 top
SJ47  [SJ_3_PASTE1&2&3]  82.55,105.41 180 top
SJ48  [SJ_3_PASTE1&2&3]  98.3,105.41 180 top
SJ49  [SJ_3_PASTE1&2&3]  114.05,105.41 180 top
U1  MAG31101:1  [DFN-10-W]  14.48,14.73 0 top
U2  MAG31101:1  [DFN-10-W]  30.23,14.73 0 top
U3  MAG31101:1  [DFN-10-W]  45.97,14.73 0 top
U4  MAG31101:1  [DFN-10-W]  61.72,14.73 0 top
U5  MAG31101:1  [DFN-10-W]  77.47,14.73 0 top
U6  MAG31101:1  [DFN-10-W]  93.22,14.73 0 top
U7  MAG31101:1  [DFN-10-W]  108.97,14.73 0 top
U8  MAG31101:1  [DFN-10-W]  14.48,30.48 0 top
U9  MAG31101:1  [DFN-10-W]  30.23,30.48 0 top
U10  MAG31101:1  [DFN-10-W]  45.97,30.48 0 top
U11  MAG31101:1  [DFN-10-W]  61.72,30.48 0 top
U12  MAG31101:1  [DFN-10-W]  77.47,30.48 0 top
U13  MAG31101:1  [DFN-10-W]  93.22,30.48 0 top
U14  MAG31101:1  [DFN-10-W]  108.97,30.48 0 top
U15  MAG31101:1  [DFN-10-W]  14.48,46.23 0 top
U16  MAG31101:1  [DFN-10-W]  30.23,46.23 0 top
U17  MAG31101:1  [DFN-10-W]  45.97,46.23 0 top
U18  MAG31101:1  [DFN-10-W]  61.72,46.23 0 top
U19  MAG31101:1  [DFN-10-W]  77.47,46.23 0 top
U20  MAG31101:1  [DFN-10-W]  93.22,46.23 0 top
U21  MAG31101:1  [DFN-10-W]  108.97,46.23 0 top
U22  MAG31101:1  [DFN-10-W]  14.48,61.98 0 top
U23  MAG31101:1  [DFN-10-W]  30.23,61.98 0 top
U24  MAG31101:1  [DFN-10-W]  45.97,61.98 0 top
U25  MAG31101:1  [DFN-10-W]  61.72,61.98 0 top
U26  MAG31101:1  [DFN-10-W]  77.47,61.98 0 top
U27  MAG31101:1  [DFN-10-W]  93.22,61.98 0 top
U28  MAG31101:1  [DFN-10-W]  108.97,61.98 0 top
U29  MAG31101:1  [DFN-10-W]  14.48,77.72 0 top
U30  MAG31101:1  [DFN-10-W]  30.23,77.72 0 top
U31  MAG31101:1  [DFN-10-W]  45.97,77.72 0 top
U32  MAG31101:1  [DFN-10-W]  61.72,77.72 0 top
U33  MAG31101:1  [DFN-10-W]  77.47,77.72 0 top
U34  MAG31101:1  [DFN-10-W]  93.22,77.72 0 top
U35  MAG31101:1  [DFN-10-W]  108.97,77.72 0 top
U36  MAG31101:1  [DFN-10-W]  14.48,93.47 0 top
U37  MAG31101:1  [DFN-10-W]  30.23,93.47 0 top
U38  MAG31101:1  [DFN-10-W]  45.97,93.47 0 top
U39  MAG31101:1  [DFN-10-W]  61.72,93.47 0 top
U40  MAG31101:1  [DFN-10-W]  77.47,93.47 0 top
U41  MAG31101:1  [DFN-10-W]  93.22,93.47 0 top
U42  MAG31101:1  [DFN-10-W]  108.97,93.47 0 top
U43  MAG31101:1  [DFN-10-W]  14.48,109.22 0 top
U44  MAG31101:1  [DFN-10-W]  30.23,109.22 0 top
U45  MAG31101:1  [DFN-10-W]  45.97,109.22 0 top
U46  MAG31101:1  [DFN-10-W]  61.72,109.22 0 top
U47  MAG31101:1  [DFN-10-W]  77.47,109.22 0 top
U48  MAG31101:1  [DFN-10-W]  93.22,109.22 0 top
U49  MAG31101:1  [DFN-10-W]  108.97,109.22 0 top

## Library data of the parts
C1-C245 JP1-JP245 R1-R98 = SparkFun
E$1 = SparkFun-Retired
E$4 E$6 FID1-FID98 LOGO1-LOGO49 = SparkFun-Aesthetics
SJ1-SJ49 = SparkFun-Passives
U1-U49 = SparkFun-Sensors